# EAGLE board Servo I2C v1.0 (EAGLE 6.4)
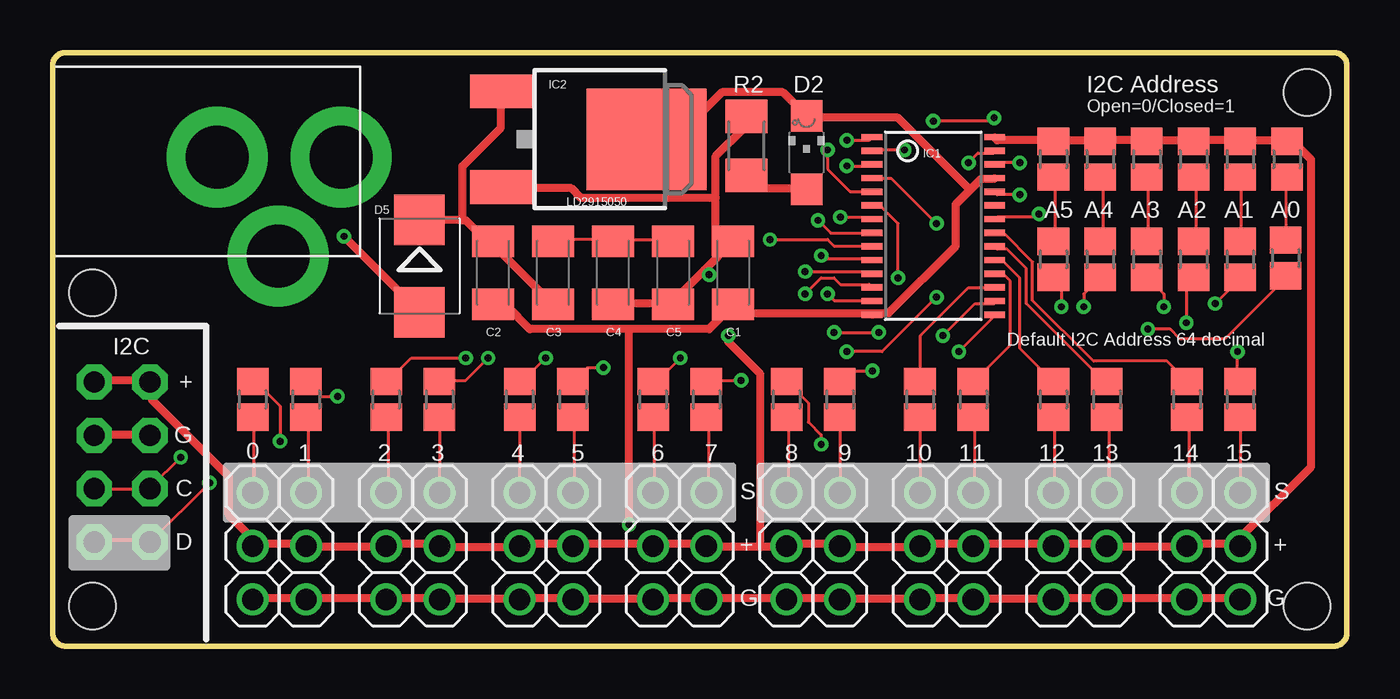
[diagram p0: board, top side]
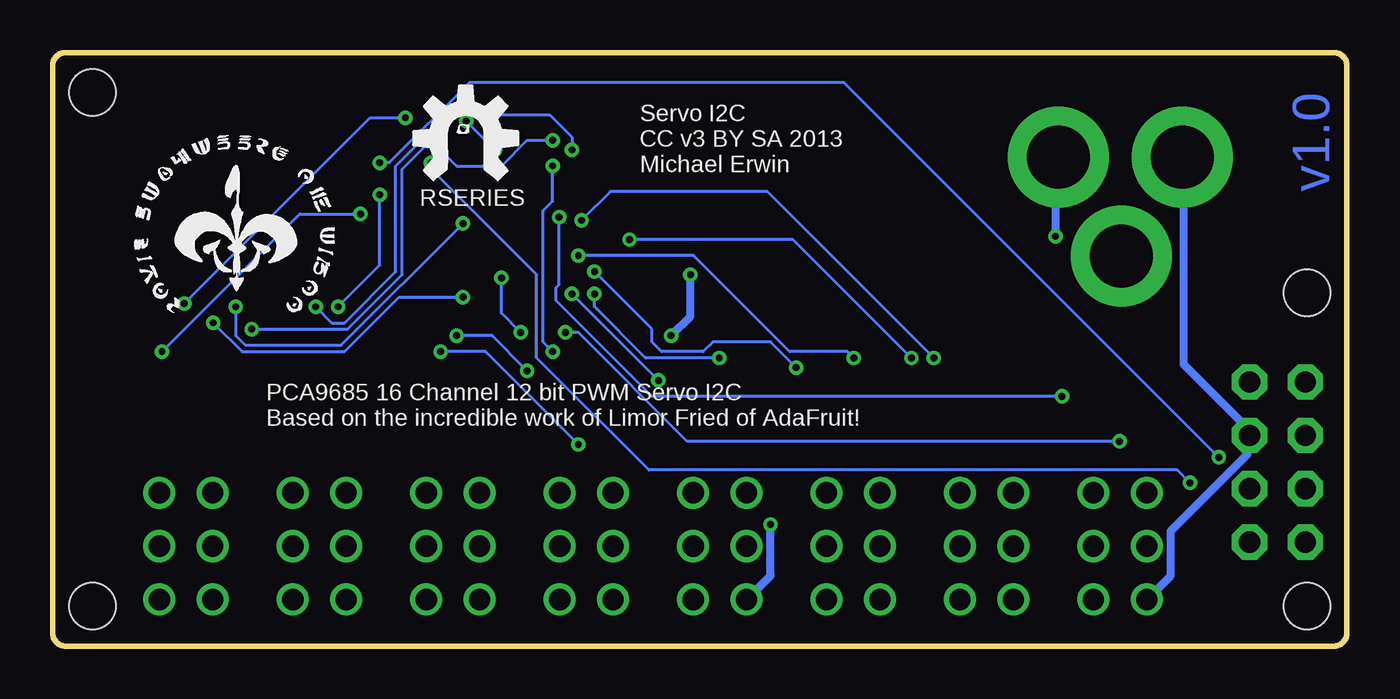
[diagram p1: board, bottom side, seen from below]

Size 61.59 x 28.26 mm. Coordinates in mm from the lower left corner, seen from the top.
Outline: 0.64,28.26 60.96,28.26 arc-90 61.59,27.62 61.59,0.64 arc-90 60.96,0 0.64,0 arc-90 0,0.64 0,27.62 arc-90 0.64,28.26
Copper layers (1*16): Top 0.0356mm / dielectric 1.5011mm / Bottom 0.0356mm
Design rules "LaenPCBOrder *": minimum track width 6mil, minimum drill 13mil, track to track 6mil, track to pad 6mil, pad to pad 6mil, via to via 12mil, smd to smd 6mil, copper to edge 15mil, drill to drill 6mil, minimum pad ring 7mil, minimum via ring 7mil, stop-mask expansion 4mil, vias tented up to drill 14mil, thermal gap 10mil
Net classes: 1 supply: width 0.381 mm, drill 0.152 mm, clearance 0.152 mm
Holes 2.2 mm at 59.69,1.91 59.69,26.35 1.91,1.91 1.91,16.83

## Footprints (pad centres in the part's own frame; a part is rotated, then mirrored left to right if it is on the bottom)
1X03 = drill 1.016: 1 -2.54,0; 2 0,0; 3 2.54,0
R0805 = smd 1.3 x 1.5: 1 -0.85,0; 2 0.85,0
C1206K = smd 1.5 x 2: 1 -1.5,0; 2 1.5,0
CHIPLED_1206 = smd 1.5 x 1.5: A 0,-1.75; C 0,1.75
SMB = smd 2.4 x 2.4: A 2.2,0; C -2.2,0
1X04-CB = drill 1.016 pad 1.676 octagon: 1 -3.81,0; 2 -1.27,0; 3 1.27,0; 4 3.81,0
TSSOP28 = smd 0.305 x 0.991: 1 -4.225,-2.918; 2 -3.575,-2.918; 3 -2.925,-2.918; 4 -2.275,-2.918; 5 -1.625,-2.918; 6 -0.975,-2.918; 7 -0.325,-2.918; 8 0.325,-2.918; 9 0.975,-2.918; 10 1.625,-2.918; 11 2.275,-2.918; 12 2.925,-2.918; 13 3.575,-2.918; 14 4.225,-2.918; 15 4.225,2.918; 16 3.575,2.918; 17 2.925,2.918; 18 2.275,2.918; 19 1.625,2.918; 20 0.975,2.918; 21 0.325,2.918; 22 -0.325,2.918; 23 -0.975,2.918; 24 -1.625,2.918; 25 -2.275,2.918; 26 -2.925,2.918; 27 -3.575,2.918; 28 -4.225,2.918
DPAK = smd 1.6 x 3: 1 -2.28,-5.31; 3 2.28,-5.31 | smd 4.826 x 5.715: 4 0,1.588
PJ-102A = drill 3 pad 4.8: RING 0.1,-3.39; RING_SW -4.6,-6.29; TIP 0.1,-9.29
M1206 = smd 1.6 x 2: 1 -1.4,0; 2 1.4,0

## Placement (x,y rotation side)
0  [1X03]  9.53,4.76 270 top
1  [1X03]  12.06,4.76 270 top
2  [1X03]  15.88,4.76 270 top
3  [1X03]  18.41,4.76 270 top
4  [1X03]  22.23,4.76 270 top
5  [1X03]  24.77,4.76 270 top
6  [1X03]  28.57,4.76 270 top
7  [1X03]  31.11,4.76 270 top
8  [1X03]  34.92,4.76 270 top
9  [1X03]  37.47,4.76 270 top
10  [1X03]  41.27,4.76 270 top
11  [1X03]  43.81,4.76 270 top
12  [1X03]  47.62,4.76 270 top
13  [1X03]  50.16,4.76 270 top
14  [1X03]  53.98,4.76 270 top
15  [1X03]  56.52,4.76 270 top
A0  [R0805]  58.74,23.18 270 top
A1  [R0805]  56.52,23.18 270 top
A2  [R0805]  54.29,23.18 270 top
A3  [R0805]  52.07,23.18 270 top
A4  [R0805]  49.85,23.18 270 top
A5  [R0805]  47.62,23.18 270 top
C1  0.1uF  [C1206K]  32.38,17.78 270 top
C2  0.1uF  [C1206K]  20.95,17.78 270 top
C3  10uf 25V  [C1206K]  23.81,17.78 90 top
C4  10uf 25V  [C1206K]  26.67,17.78 90 top
C5  0.1uF  [C1206K]  29.53,17.78 90 top
D2  [CHIPLED_1206]  35.88,23.5 0 top
D5  [SMB]  17.46,18.1 270 top
I2C  [1X04-CB]  1.98,8.76 90 top
I2C1  [1X04-CB]  4.64,8.76 90 top
IC1  PCA9685  [TSSOP28]  41.91,20 270 top
IC2  LM2931_FIXED  [DPAK]  26.67,24.13 270 top
J2  2.1MMJACK  [PJ-102A]  4.45,23.18 90 top
R1  10K  [R0805]  58.67,18.48 270 top
R2  1.0 K  [M1206]  33.02,23.81 270 top
R3  220  [R0805]  28.57,11.75 270 top
R4  10K  [R0805]  56.52,18.41 270 top
R5  10K  [R0805]  54.29,18.41 270 top
R6  10K  [R0805]  52.07,18.41 270 top
R7  10K  [R0805]  49.85,18.41 270 top
R8  10K  [R0805]  47.62,18.41 270 top
R9  220  [R0805]  9.53,11.75 270 top
R10  220  [R0805]  12.06,11.75 270 top
R11  220  [R0805]  15.88,11.75 270 top
R12  220  [R0805]  18.41,11.75 270 top
R13  220  [R0805]  22.23,11.75 270 top
R14  220  [R0805]  24.77,11.75 270 top
R15  220  [R0805]  31.11,11.75 270 top
R16  220  [R0805]  34.92,11.75 270 top
R17  220  [R0805]  37.47,11.75 270 top
R18  220  [R0805]  41.27,11.75 270 top
R19  220  [R0805]  43.81,11.75 270 top
R20  220  [R0805]  47.62,11.75 270 top
R21  220  [R0805]  50.16,11.75 270 top
R22  220  [R0805]  53.98,11.75 270 top
R23  220  [R0805]  56.52,11.75 270 top
U$2  RSERIES-OSHW-LOGOMEDIUM  [RSERIES-OSHW-LOGO-MEDIUM]  42.04,24.23 0 bottom
U$3  ROYAL-ENGINEERS-OF-NABOOSMALL  [ROYAL-ENGINEERS-OF-NABOO-SMALL]  57.78,15.56 0 bottom

## Library data of the parts
0 1-15 = adafruit
A0 A1-A5 R1 R3-R23 = rcl-ez
C1 C2 C5 D2 J2 R2 = minimidi
C3 C4 = rcl
D5 = diode
I2C I2C1 = carduino
IC1 = adafruit3
IC2 = SparkFun-PowerIC
U$2 U$3 = rseries

## Nets
+5V [supply]: 0.2 1.2 2.2 3.2 4.2 5.2 6.2 7.2 8.2 9.2 10.2 11.2 12.2 13.2 14.2 15.2 A0.1 A1.1 A2.1 A3.1 A4.1 A5.1 C1.1 C4.1 C5.1 I2C1.4 I2C.4 IC1.28 IC2.3 R2.1
+9V [supply]: C2.1 C3.1 D5.C IC2.1
A0: IC1.1 R1.2
A1: IC1.2 R4.2
A2: IC1.3 R5.2
A3: IC1.4 R6.2
A4: IC1.5 R7.2
A5: IC1.24 R8.2
GND [supply]: 0.3 1.3 2.3 3.3 4.3 5.3 6.3 7.3 8.3 9.3 10.3 11.3 12.3 13.3 14.3 15.3 C1.2 C2.2 D2.C I2C1.3 I2C.3 IC1.14 IC1.25 IC2.4 J2.RING
N$1: A0.2 R1.1
N$2: A1.2 R4.1
N$3: A2.2 R5.1
N$4: 6.1 R3.2
N$5 [supply]: D2.A R2.2
N$6 [supply]: D5.A J2.TIP
N$7: A3.2 R6.1
N$8: C3.2 C4.2 C5.2
N$9: A4.2 R7.1
N$10: A5.2 R8.1
N$11: 1.1 R10.2
N$12: 2.1 R11.2
N$13: 3.1 R12.2
N$14: 4.1 R13.2
N$15: 5.1 R14.2
N$16: 7.1 R15.2
N$17: 8.1 R16.2
N$18: 9.1 R17.2
N$19: 10.1 R18.2
N$20: 11.1 R19.2
N$21: 12.1 R20.2
N$22: 13.1 R21.2
N$23: IC1.23
N$24: 14.1 R22.2
N$25: 15.1 R23.2
N$31: 0.1 R9.2
PWM0: IC1.6 R9.1
PWM1: IC1.7 R10.1
PWM2: IC1.8 R11.1
PWM3: IC1.9 R12.1
PWM4: IC1.10 R13.1
PWM5: IC1.11 R14.1
PWM6: IC1.12 R3.1
PWM7: IC1.13 R15.1
PWM8: IC1.15 R16.1
PWM9: IC1.16 R17.1
PWM10: IC1.17 R18.1
PWM11: IC1.18 R19.1
PWM12: IC1.19 R20.1
PWM13: IC1.20 R21.1
PWM14: IC1.21 R22.1
PWM15: IC1.22 R23.1
SCL: I2C1.2 I2C.2 IC1.26
SDA: I2C1.1 I2C.1 IC1.27

## Tracks (layer width: path | path; a pad name or v marks a point on that pad's centre or on a via)
+5V  (via drill 0.33)
  Top 0.381: I2C.4 1.98,12.65 4.57,12.65 I2C1.4 4.72,12.5 4.72,11.73 8.38,8.08 8.38,6.25 9.6,5.03 0.2 9.6,4.88 12.04,4.88 1.2 12.19,4.72 15.7,4.72 2.2 16,4.88 18.29,4.88 3.2 18.59,4.72 22.1,4.72 4.2 22.25,4.88 24.69,4.88 5.2 24.84,4.88 28.5,4.88 6.2 28.65,4.88 31.09,4.88 7.2 31.24,4.72 33.68,4.72 | C4.1 26.67,16.31 29.41,16.31 C5.1 29.57,16.46 31.01,17.91 | 31.01,17.91 32.31,19.2 C1.1 31.55,18.59 31.55,21.34 | 31.55,21.34 31.55,23.32 32.92,24.69 32.92,25.15 R2.1 | IC2.3 21.49,21.79 24.69,21.79 25.15,21.34 31.39,21.34 31.55,21.34 | 33.68,4.72 34.75,4.72 8.2 35.05,4.88 37.34,4.88 9.2 37.64,4.72 41.15,4.72 10.2 41.3,4.88 43.74,4.88 11.2 43.89,4.88 47.55,4.88 12.2 47.7,4.88 50.14,4.88 13.2 50.29,4.72 53.8,4.72 14.2 54.1,4.88 56.39,4.88 15.2 56.39,5.03 59.89,8.53 59.89,23.16 59.13,23.93 58.83,23.93 A0.1 58.67,24.08 56.69,24.08 A1.1 56.39,24.08 54.41,24.08 A2.1 54.25,24.08 52.12,24.08 A3.1 51.97,24.08 49.99,24.08 A4.1 49.68,24.08 47.7,24.08 A5.1 47.55,24.08 44.96,24.08 IC1.28 | v31.24,17.68 31.09,17.83 31.01,17.91 | v32.16,14.78 32.16,14.48 33.68,12.95 33.68,4.88 33.68,4.72
  Bottom 0.381: v31.24,17.68 31.24,15.7 v32.16,14.78
+9V
  Top 0.381: C3.1 23.77,16.31 20.88,19.2 C2.1 20.73,19.2 19.66,20.27 19.51,20.27 | 19.51,20.27 17.53,20.27 D5.C | IC2.1 21.34,26.36 21.34,24.69 19.51,22.86 19.51,20.42 19.51,20.27
A0  (via drill 0.33)
  Top 0.152: v37.8,24.08 38.86,24.08 IC1.1 | v52.12,15.09 53.19,15.09 53.65,14.63 55.78,14.63 58.67,17.53 R1.2
  Bottom 0.152: v37.8,24.08 39.01,24.08 40.23,22.86 42.37,22.86 43.28,23.77 43.89,23.77 44.96,22.71 44.96,17.68 47.55,15.09 v52.12,15.09
A1  (via drill 0.33)
  Top 0.152: v40.54,23.62 39.01,23.62 IC1.2 | v41.91,24.99 44.65,24.99 v44.81,25.15 | v55.32,16.31 56.54,17.53 R4.2
  Bottom 0.152: v41.91,24.99 v40.54,23.62 | v44.81,25.15 46.48,25.15 v55.32,16.31
A2  (via drill 0.33)
  Top 0.152: v37.8,22.86 38.86,22.86 IC1.3 | v37.8,14.02 39.47,14.02 v42.06,16.61 | v53.95,15.39 53.95,17.22 54.25,17.53 R5.2
  Bottom 0.152: v37.8,22.86 37.8,21.18 38.25,20.73 38.25,14.48 v37.8,14.02 | v42.06,16.61 45.11,16.61 47.7,14.02 52.58,14.02 v53.95,15.39
A3  (via drill 0.33)
  Top 0.152: v42.06,20.12 39.93,22.25 39.01,22.25 IC1.4 | v52.88,16.15 52.88,16.76 52.12,17.53 R6.2
  Bottom 0.152: v42.06,20.12 47.85,14.33 52.43,14.33 52.88,14.78 v52.88,16.15
A4  (via drill 0.33)
  Top 0.152: v36.88,23.62 36.88,22.71 37.95,21.64 38.86,21.64 IC1.5 | v49.07,16.15 49.07,16.76 49.84,17.53 R7.2
  Bottom 0.152: v36.88,23.62 36.88,24.23 37.95,25.3 41.15,25.3 41.6,25.76 42.37,25.76 45.26,22.86 45.26,17.83 47.7,15.39 48.31,15.39 v49.07,16.15
A5  (via drill 0.33)
  Top 0.152: v46.02,21.49 44.96,21.49 IC1.24 | v48.01,16.15 48.01,17.22 47.7,17.53 R8.2
  Bottom 0.152: v46.02,21.49 46.02,18.14 v48.01,16.15
GND  (via drill 0.33)
  Top 0.381: IC1.14 39.01,15.85 IC1.14 | IC1.14 38.86,15.85 32.77,15.85 32.46,16.15 C1.2 32.31,16.15 31.24,15.09 27.43,15.09 | 43.66,21.72 42.98,21.03 42.98,19.05 39.78,15.85 39.17,15.85 IC1.14 | 43.66,21.72 44.2,22.25 44.81,22.25 IC1.25 | 43.66,21.72 43.59,21.79 40.23,25.15 35.97,25.15 D2.C 35.81,25.3 34.75,26.36 31.85,26.36 29.72,24.23 28.35,24.23 IC2.4 | 27.43,15.09 22.71,15.09 21.64,16.15 21.03,16.15 C2.2 | 15.3 56.39,2.29 54.1,2.29 14.3 53.8,2.29 50.29,2.29 13.3 50.14,2.29 47.7,2.29 12.3 47.55,2.29 43.89,2.29 11.3 43.74,2.29 41.3,2.29 10.3 41.15,2.29 37.64,2.29 9.3 37.34,2.29 35.05,2.29 8.3 34.75,2.29 31.24,2.29 7.3 31.09,2.29 28.65,2.29 6.3 28.5,2.29 24.84,2.29 5.3 24.69,2.29 22.25,2.29 4.3 22.1,2.29 18.59,2.29 3.3 18.29,2.29 16,2.29 2.3 15.7,2.29 12.19,2.29 1.3 12.04,2.29 9.6,2.29 0.3 | I2C.3 1.98,10.06 4.57,10.06 I2C1.3 | v27.43,5.79 27.43,14.94 27.43,15.09
  Bottom 0.381: 0.3 9.45,2.29 8.38,3.35 8.38,5.49 4.72,9.14 4.72,9.91 I2C1.3 4.57,10.21 7.77,13.41 7.77,23.16 J2.RING | v27.43,5.79 27.43,3.35 28.5,2.29 6.3
N$1
  Top 0.152: R1.1 58.67,19.36 58.67,22.25 A0.2
N$2
  Top 0.152: R4.1 56.54,19.36 56.54,22.25 A1.2
N$3
  Top 0.152: R5.1 54.41,19.36 54.41,22.25 A2.2
N$4
  Top 0.152: R3.2 28.65,10.82 28.65,7.32 6.1
N$5
  Top 0.381: D2.A 35.81,21.79 33.68,21.79 33.07,22.4 R2.2
N$6  (via drill 0.33)
  Top 0.381: v13.87,19.51 17.37,16 D5.A
  Bottom 0.381: v13.87,19.51 13.87,23.16 J2.TIP
N$7
  Top 0.152: R6.1 52.12,19.36 52.12,22.25 A3.2
N$8
  Top 0.152: 26.67,19.36 23.93,19.36 C3.2 | 26.67,19.36 C4.2 26.67,19.36 | 26.67,19.36 29.41,19.36 C5.2
N$9
  Top 0.152: R7.1 49.99,19.36 49.99,22.25 A4.2
N$10
  Top 0.152: R8.1 47.7,19.36 47.7,22.25 A5.2
N$11
  Top 0.152: R10.2 12.19,10.82 12.19,7.32 1.1
N$12
  Top 0.152: R11.2 16,10.82 16,7.32 2.1
N$13
  Top 0.152: R12.2 18.44,10.82 18.44,7.32 3.1
N$14
  Top 0.152: R13.2 22.25,10.82 22.25,7.32 4.1
N$15
  Top 0.152: R14.2 24.84,10.82 24.84,7.32 5.1
N$16
  Top 0.152: R15.2 31.24,10.82 31.24,7.32 7.1
N$17
  Top 0.152: R16.2 35.05,10.82 35.05,7.32 8.1
N$18
  Top 0.152: R17.2 37.49,10.82 37.49,7.32 9.1
N$19
  Top 0.152: R18.2 41.3,10.82 41.3,7.32 10.1
N$20
  Top 0.152: R19.2 43.89,10.82 43.89,7.32 11.1
N$21
  Top 0.152: R20.2 47.7,10.82 47.7,7.32 12.1
N$22
  Top 0.152: R21.2 50.29,10.82 50.29,7.32 13.1
N$24
  Top 0.152: R22.2 54.1,10.82 54.1,7.32 14.1
N$25
  Top 0.152: R23.2 56.54,10.82 56.54,7.32 15.1
N$31
  Top 0.152: R9.2 9.6,10.82 9.6,7.32 0.1
PWM0  (via drill 0.33)
  Top 0.152: v40.23,17.53 40.23,20.12 39.47,20.88 39.01,20.88 IC1.6 | v37.19,14.94 v39.32,14.94 | v10.82,9.75 10.82,11.43 9.6,12.65 R9.1
  Bottom 0.152: v40.23,17.53 40.23,15.85 v39.32,14.94 | v37.19,14.94 36.58,14.94 31.39,9.75 v10.82,9.75
PWM1  (via drill 0.33)
  Top 0.152: v37.49,20.42 38.86,20.42 IC1.7 | v13.56,11.89 12.8,11.89 12.19,12.5 R10.1
  Bottom 0.152: v37.49,20.42 37.49,17.22 37.64,17.07 37.64,16.46 33.07,11.89 v13.56,11.89
PWM2  (via drill 0.33)
  Top 0.152: v36.42,20.27 37.03,19.66 38.86,19.66 IC1.8 | v19.66,13.72 17.07,13.72 16,12.65 R11.1
  Bottom 0.152: v36.42,20.27 35.05,21.64 27.58,21.64 v19.66,13.72
PWM3  (via drill 0.33)
  Top 0.152: v34.14,19.36 36.88,19.36 37.19,19.05 38.86,19.05 IC1.9 | v20.73,13.72 19.66,12.65 18.44,12.65 R12.1
  Bottom 0.152: v34.14,19.36 26.36,19.36 v20.73,13.72
PWM4  (via drill 0.33)
  Top 0.152: v36.58,18.59 36.73,18.44 38.86,18.44 IC1.10 | v23.47,13.72 22.25,12.5 R13.1
  Bottom 0.152: v36.58,18.59 31.09,18.59 26.52,14.02 23.77,14.02 v23.47,13.72
PWM5  (via drill 0.33)
  Top 0.152: v35.81,17.83 38.86,17.83 IC1.11 | v26.21,13.26 25.45,13.26 24.84,12.65 R14.1
  Bottom 0.152: v35.81,17.83 33.07,15.09 33.07,14.48 32.61,14.02 30.63,14.02 30.18,14.48 27.43,14.48 v26.21,13.26
PWM6  (via drill 0.33)
  Top 0.152: v35.81,16.76 36.58,17.53 37.19,17.53 37.49,17.22 38.86,17.22 IC1.12 | v29.87,13.72 28.65,12.5 R3.1
  Bottom 0.152: v35.81,16.76 35.81,16.15 33.38,13.72 v29.87,13.72
PWM7  (via drill 0.33)
  Top 0.152: v36.88,16.76 37.19,16.46 38.86,16.46 IC1.13 | v32.77,12.65 31.24,12.65 R15.1
  Bottom 0.152: v32.77,12.65 v36.88,16.76
PWM8  (via drill 0.33)
  Top 0.152: v43.13,14.02 44.81,15.7 IC1.15 | v36.58,9.6 36.58,10.06 35.97,10.67 35.97,11.58 35.05,12.5 R16.1
  Bottom 0.152: v43.13,14.02 41,14.02 v36.58,9.6
PWM9  (via drill 0.33)
  Top 0.152: v42.37,14.78 43.89,16.31 44.81,16.31 IC1.16 | v39.01,13.11 37.95,13.11 37.49,12.65 R17.1
  Bottom 0.152: v42.37,14.78 40.69,14.78 v39.01,13.11
PWM10
  Top 0.152: IC1.17 44.81,17.07 43.59,17.07 41.3,14.78 41.3,12.65 R18.1
PWM11
  Top 0.152: IC1.18 44.96,17.68 45.26,17.68 45.57,17.37 45.57,14.33 43.89,12.65 R19.1
PWM12
  Top 0.152: IC1.19 44.96,18.29 45.26,18.29 46.02,17.53 46.02,14.17 47.55,12.65 R20.1
PWM13
  Top 0.152: IC1.20 44.96,18.9 45.41,18.9 46.33,17.98 46.33,16.31 50.14,12.5 R21.1
PWM14
  Top 0.152: IC1.21 44.96,19.66 45.26,19.66 46.63,18.29 46.63,16.46 49.53,13.56 53.03,13.56 53.95,12.65 R22.1
PWM15  (via drill 0.33)
  Top 0.152: v46.94,20.57 46.79,20.42 44.96,20.42 IC1.22 | v56.39,14.02 56.39,12.65 R23.1
  Bottom 0.152: v46.94,20.57 49.84,20.57 v56.39,14.02
SCL  (via drill 0.33)
  Top 0.152: v46.02,23.01 44.96,23.01 IC1.26 | v6.1,8.99 4.72,7.62 I2C1.2 4.57,7.47 1.98,7.47 I2C.2
  Bottom 0.152: v46.02,23.01 45.57,23.01 41.76,26.82 23.93,26.82 v6.1,8.99
SDA  (via drill 0.33)
  Top 0.152: v43.59,23.01 44.04,23.47 44.81,23.47 IC1.27 | v7.47,7.77 4.72,5.03 I2C1.1 4.57,5.03 1.98,5.03 I2C.1
  Bottom 0.152: v43.59,23.01 43.59,22.71 38.56,17.68 38.56,13.72 33.22,8.38 8.08,8.38 v7.47,7.77

## Text on the board
Bottom: v1.0
tPlace: Default I2C Address 64 decimal
bPlace: RSERIES | PCA9685 16 Channel 12 bit PWM Servo I2C / Based on the incredible work of Limor Fried of AdaFruit!
_tsilk: I2C Address | Open=0/Closed=1 | LD2915050 | + | G | 0 | C | S | S | D | + | + | G | G
_bsilk: Servo I2C / CC v3 BY SA 2013 / Michael Erwin